# Altium PCB PCB1.PcbDoc
Units mm, origin at the board's own origin, x right, y up, seen from the top; angles counter-clockwise.
Board outline 31 x 23 mm, 2 copper layers (Top Layer, Bottom Layer); 3 components, 5 nets, 11 pads, 0 vias.
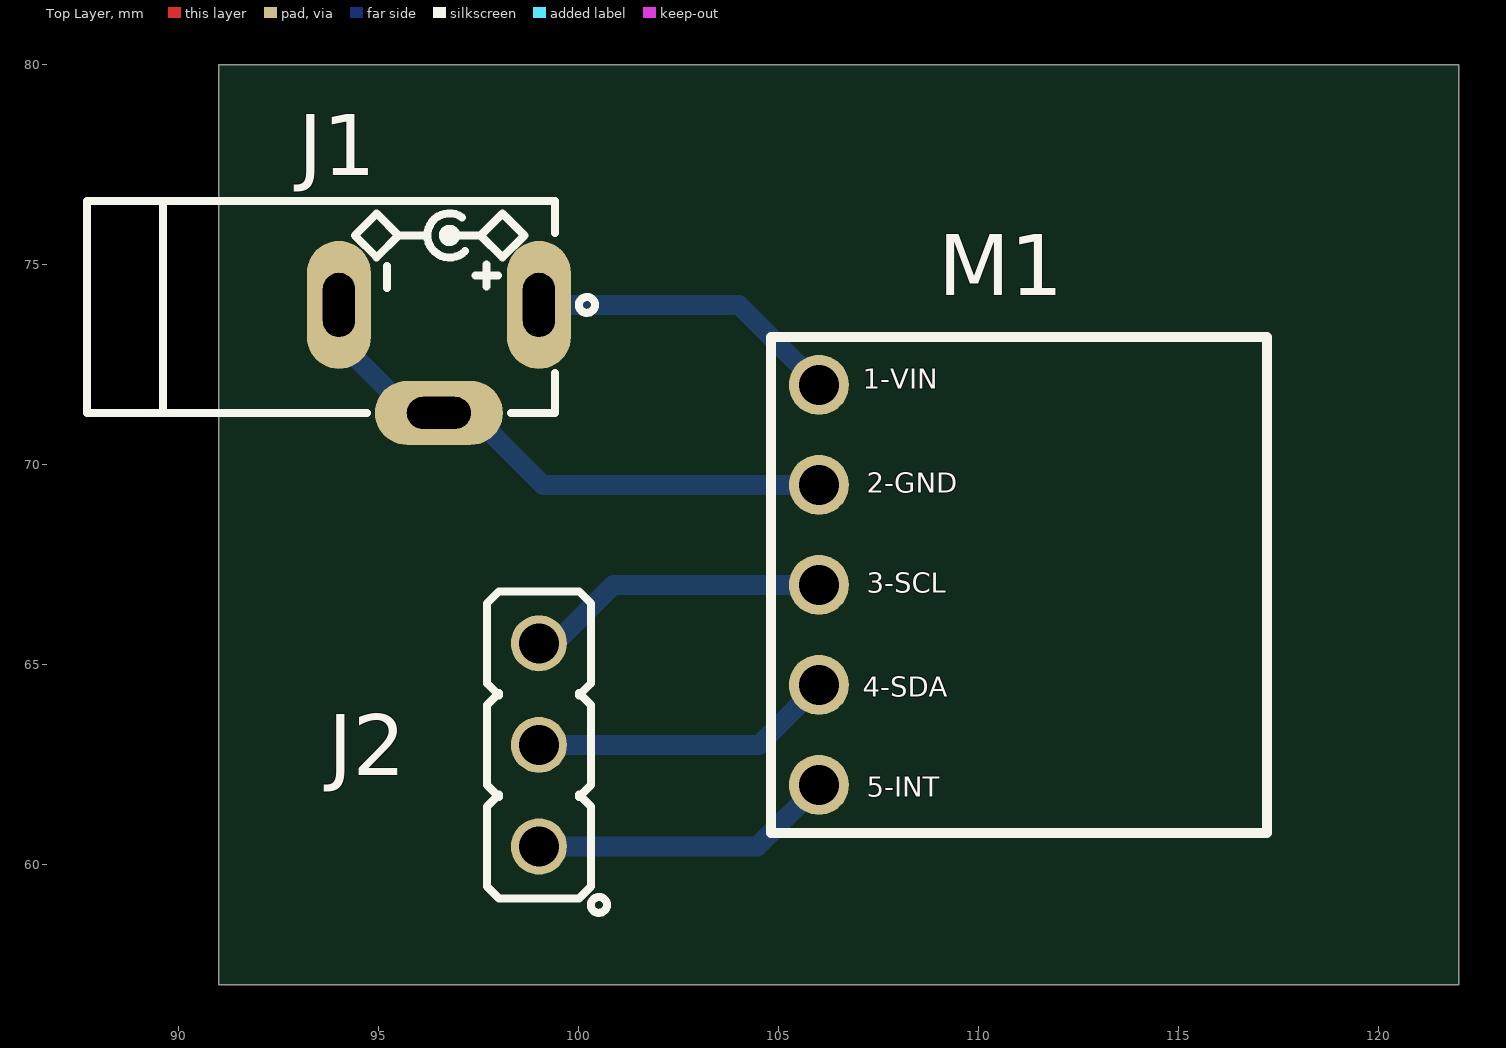
[diagram p0: Top Layer view]
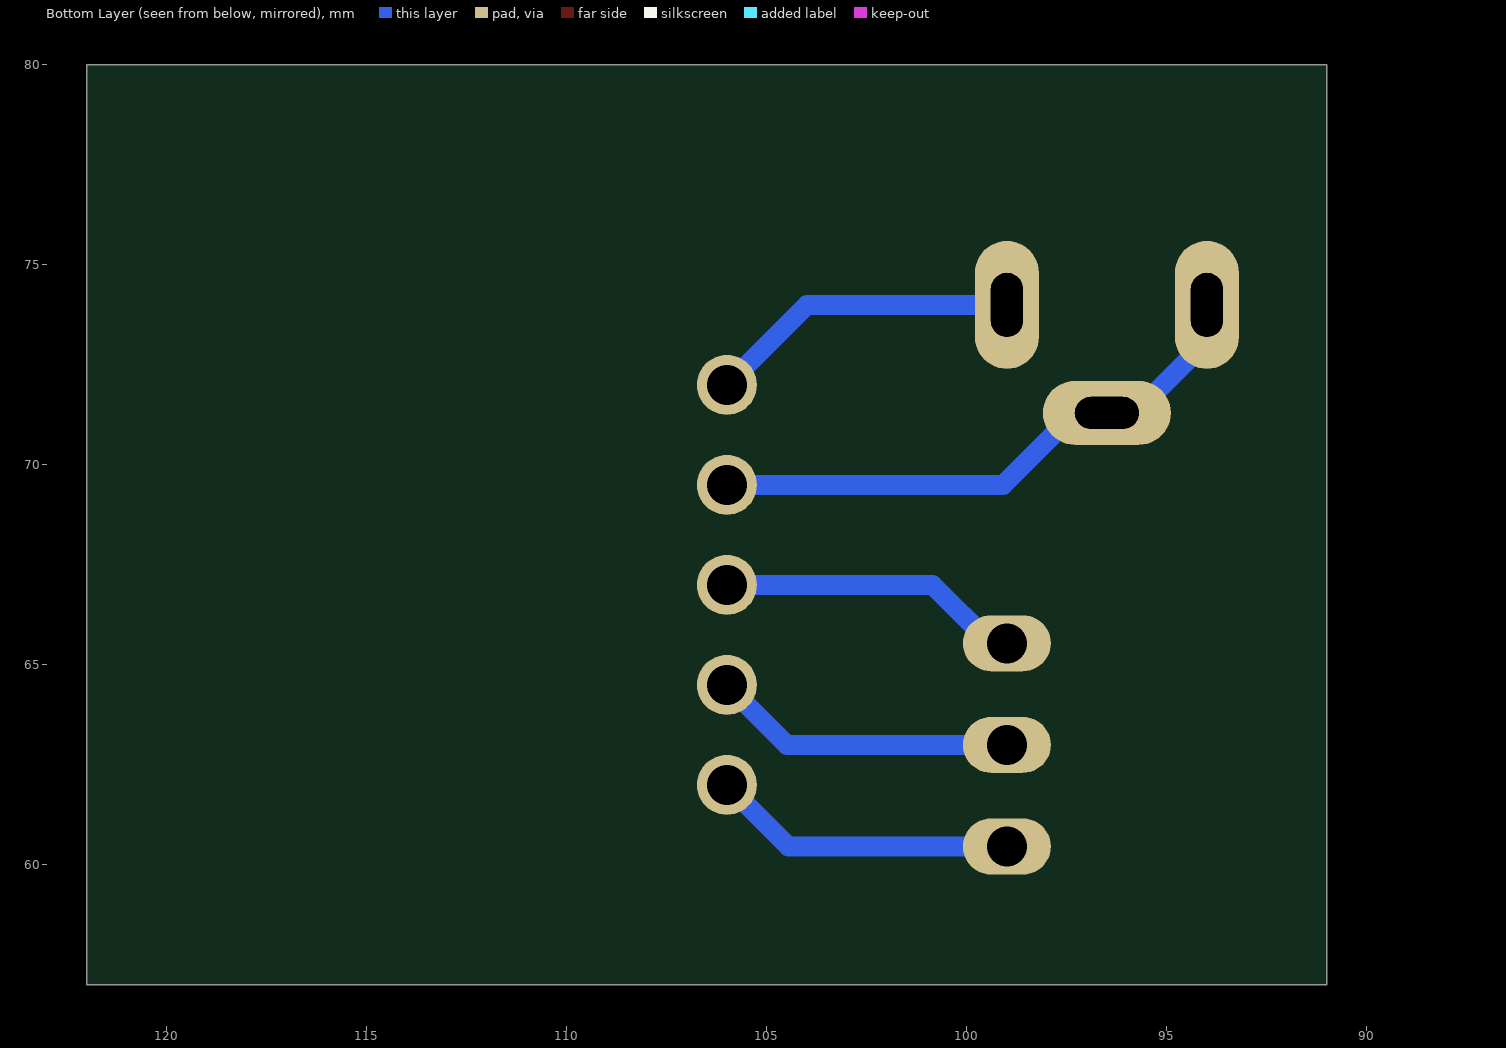
[diagram p1: Bottom Layer view, seen from below]

## Layer stack, top to bottom
Top Solder: solder mask 0.0102, Solder Resist, Dk 3.5
Top Layer: signal copper 0.0356
Dielectric 1: dielectric 0.32, FR-4, Dk 4.8
Bottom Layer: signal copper 0.0356
Bottom Solder: solder mask 0.0102, Solder Resist, Dk 3.5

## Board outline
91,57 122,57 122,80 91,80

## Design rules (kind name [scope] priority, off if disabled: settings)
Clearance [All] p1: gap=0.3 ignorepadtopadclearanceinfootprint=FALSE
PolygonConnect [All] p1: connectstyle=Relief reliefconductorwidth=0.254 reliefentries=4 polygonreliefangle="90 Angle" airgapwidth=0.254
RoutingVias [All] p1: holewidth=0.711 width=1.27 viastyle="Through Hole" minholewidth=0.711 minwidth=1.27 maxholewidth=0.711 maxwidth=1.27
SolderMaskExpansion [All] p1: expansion=0.102 istentingtop=FALSE
SupplyNets "Schematic Supply Nets" [InNet('5V')] p1: voltage=0.000
Width [All] p1: maxlimit=1.5 minlimit=0.5 preferedwidth=1 minimp=50.000000 maximp=50.000000 favimp=50.000000
30 further rules are at their usual default settings.

## Classes and differential pairs
component class Sheet1: J1 M1

## Components (designator, comment, footprint, x,y, rotation, side; value= is the part's Value field where it differs from the comment)
J1 "DC_POWER_JACK" JAC_PWR1 99,74 r90 top
J2 "HDRM3" HDR_M_1X3 99,63 r90 top
M1 "(MAX30102)Module" MODULE-MAX30102 111,67 r90 top

## Footprints (in the part's own frame and the unit in brackets; to place one, negate y for a bottom-side part, rotate by r counter-clockwise, add the part's x,y. Pads: shape width x height; smd on the part's side, far side on the other; paste and mask are expansions set on the pad)
HDR_M_1X3 [mm] "Connector; Header; 3 Position"
  round 1.4 / inner round 1.4 / far side oval 1.4x2.2 hole 1 mask+0.1: 1(-2.54,0) 2(0,0) 3(2.54,0)
  silkscreen extent -4.2,-1.7 3.84,1.3, body extent -3.78,-1.27 3.84,1.27, height 8.54
JAC_PWR1 [mm] "DC POWER JACK, 1mm, Power Jack PJ-031C"
  oval 3.2x1.6 hole 0.8 slot 1.6 at 0 deg: 1(0,0) 2(0,5)
  oval 1.6x3.2 hole 0.8 slot 1.6 at 90 deg: 3(-2.7,2.5)
  silkscreen extent -2.7,-1.4 2.6,11.3, body extent -2.9,-0.4 2.5,11.2, height 7.4
MODULE-MAX30102 [mm] "Heart Rate Sensor Module (MAX30102)"
  round 1.5 hole 1: 1(5,5) 2(2.5,5) 3(0,5) 4(-2.5,5) 5(-5,5)
  silkscreen extent -6.2,-6.2 6.2,6.2, body extent -6,-6 6,6, height 1.61

## Part data
J1: library part CONN_PWR_JACKR1, "CONN, PWR JACK DC, PLUG DIAM 1.0MM RA THD", MANF="CUI STACK", MANF_P#="PJ-031CH, PJ-031C", PARAM="CH 3A, C 2A"
J2: library part HDR_M_1X3, "CONN, HEADER, Male, pitch: 2.54mm, 3POS"
M1: library part MODULE-MAX30102, "Heart Rate Sensor Module (MAX30102)"

## Nets (pads, with @x,y where several pads share a name; then routed paths per layer and width w, separated by ;. In a path a pad name is that pad's centre, name@x,y a point inside that pad or via, vN(x,y) a via of type N, cw(c..) or ccw(c..) an arc to the next point about the centre after c; other vN are vias at no path point)
5V: J1.1 M1.1 | length 7.8
  Bottom Layer w0.5: J1.1 104,74 M1.1
NetJ1_2: J1.2 J1.3 M1.2 | length 14.4
  Bottom Layer w0.5: J1.2 94,73.1 95.8,71.3 J1.3 97.3,71.3 99.1,69.5 M1.2
NetJ2_1: J2.1 M1.5 | length 7.6
  Bottom Layer w0.5: J2.1 104.46,60.46 M1.5
NetJ2_2: J2.2 M1.4 | length 7.6
  Bottom Layer w0.5: J2.2 104.5,63 M1.4
NetJ2_3: J2.3 M1.3 | length 7.6
  Bottom Layer w0.5: J2.3 99.4,65.54 100.86,67 M1.3

## Text inside footprints (layer, text, board x,y; h text height)
M1: Top Overlay "5-INT" at 107.2,61.7 h0.5; Top Overlay "4-SDA" at 107.1,64.2 h0.5; Top Overlay "3-SCL" at 107.2,66.8 h0.5; Top Overlay "2-GND" at 107.2,69.3 h0.5; Top Overlay "1-VIN" at 107.1,71.9 h0.5